# EAGLE board new (EAGLE 6.0)

No outline drawn. Coordinates in mm, seen from the top.
Copper layers (1*16): Top 0.035mm / dielectric 1.5mm / Bottom 0.035mm
Design rules: minimum track width 10mil, minimum drill 24mil, track to track 8mil, track to pad 8mil, pad to pad 8mil, via to via 8mil, smd to smd 8mil, copper to edge 40mil, drill to drill 8mil, minimum pad ring 10mil, minimum via ring 8mil, stop-mask expansion 4mil, vias tented up to drill 0mil, thermal gap 10mil

## Footprints (pad centres in the part's own frame; a part is rotated, then mirrored left to right if it is on the bottom)
SOIC-28 = smd 1.27 x 0.635: 1 -4.445,8.255; 2 -4.445,6.985; 3 -4.445,5.715; 4 -4.445,4.445; 5 -4.445,3.175; 6 -4.445,1.905; 7 -4.445,0.635; 8 -4.445,-0.635; 9 -4.445,-1.905; 10 -4.445,-3.175; 11 -4.445,-4.445; 12 -4.445,-5.715; 13 -4.445,-6.985; 14 -4.445,-8.255; 15 4.445,-8.255; 16 4.445,-6.985; 17 4.445,-5.715; 18 4.445,-4.445; 19 4.445,-3.175; 20 4.445,-1.905; 21 4.445,-0.635; 22 4.445,0.635; 23 4.445,1.905; 24 4.445,3.175; 25 4.445,4.445; 26 4.445,5.715; 27 4.445,6.985; 28 4.445,8.255

## Placement (x,y rotation side)
E$1  [SOIC-28]  16.51,21.59 0 top

## Library data of the parts
E$1 = pic18f2320